# EAGLE board Tape (EAGLE 9.6.2)
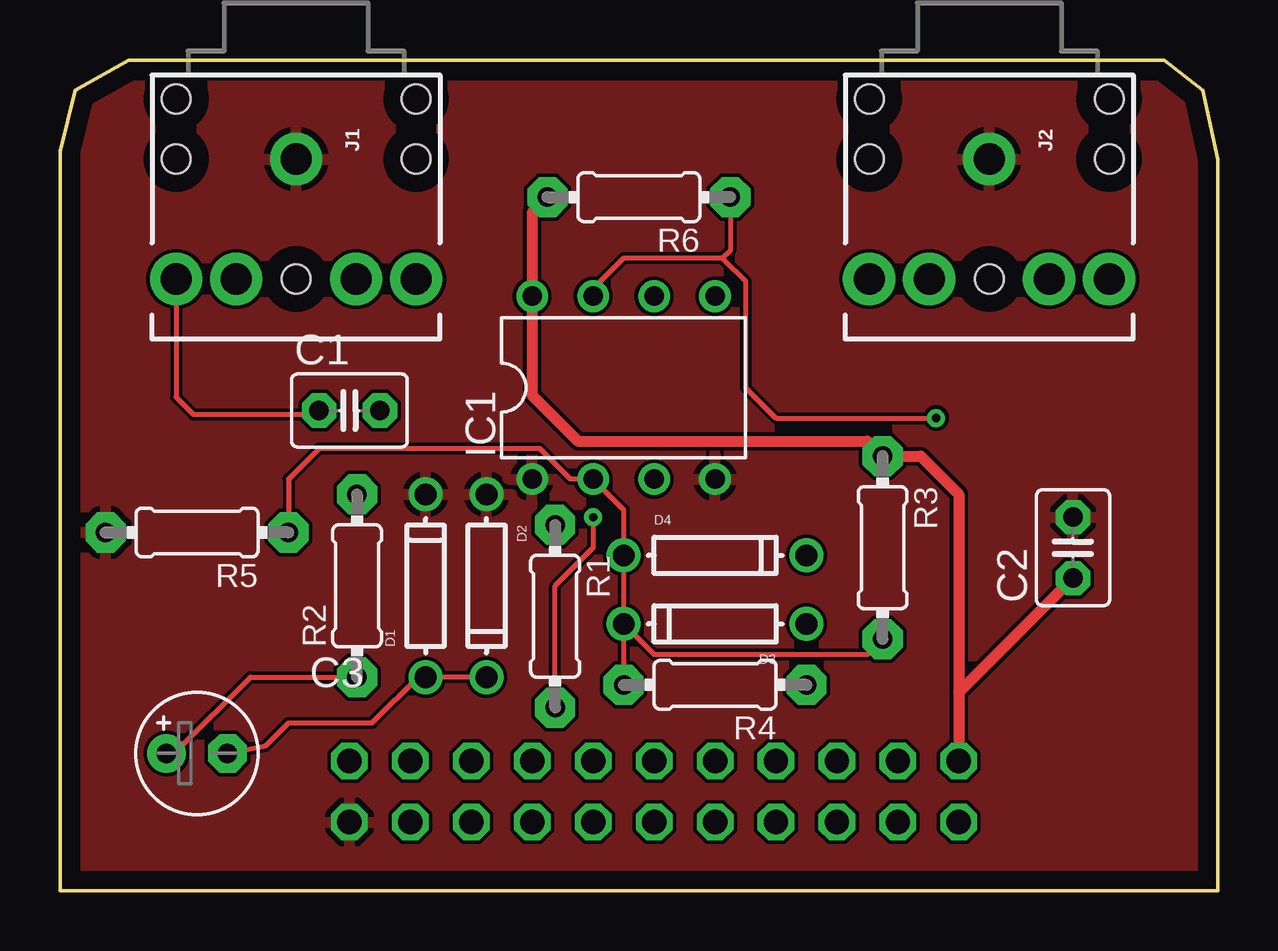
[diagram p0: board, top side]
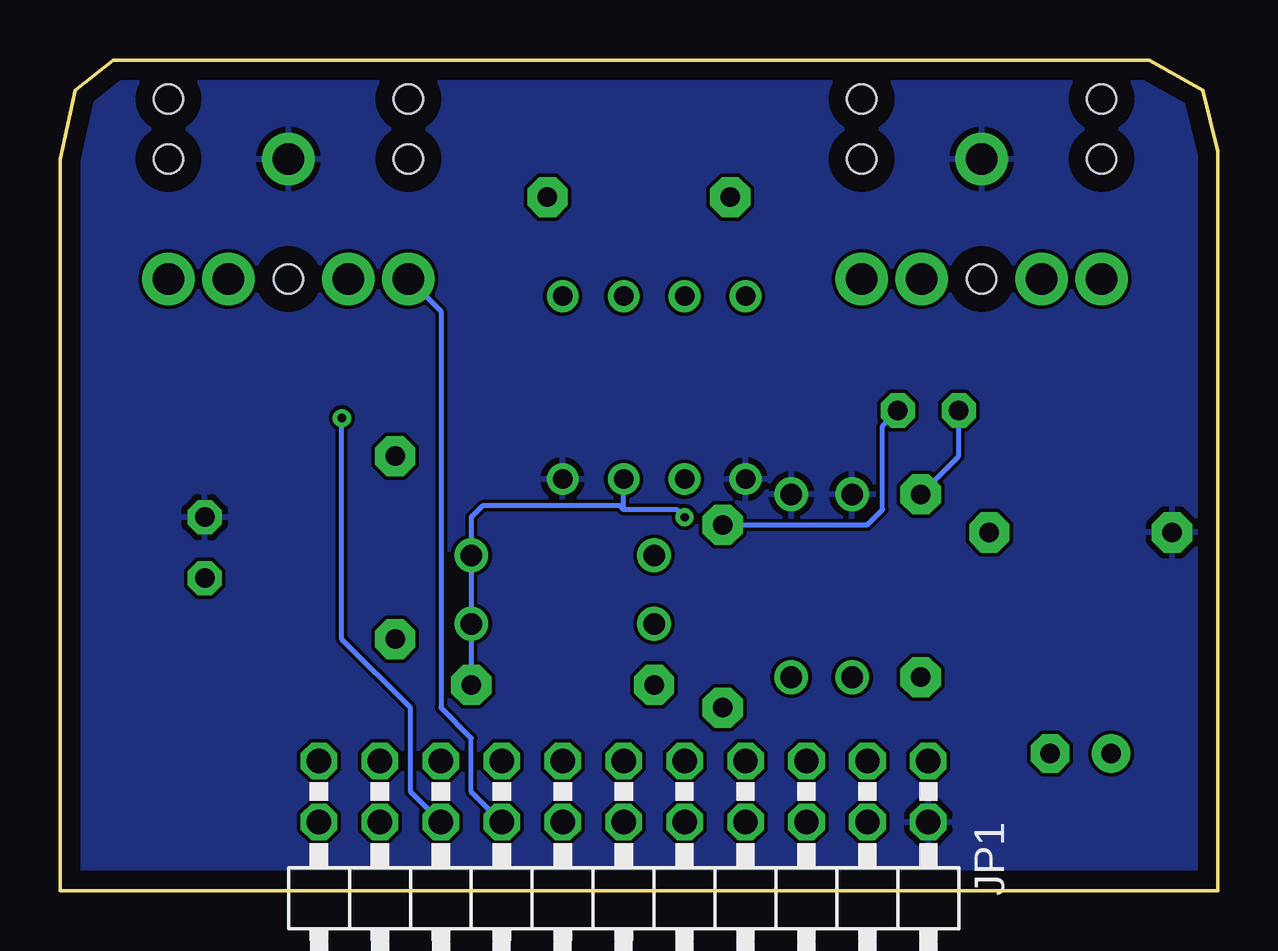
[diagram p1: board, bottom side, seen from below]

Size 48.26 x 34.61 mm. Coordinates in mm from the lower left corner, seen from the top.
Outline: 0.64,33.34 2.86,34.61 46.04,34.61 47.62,33.34 48.26,30.48 48.26,0 0,0 0,30.8 0.64,33.34
Copper layers (1*16): Top 0.035mm / dielectric 1.5mm / Bottom 0.035mm
Design rules "default *": minimum track width 6mil, minimum drill 0.35mm, track to track 6mil, track to pad 6mil, pad to pad 6mil, via to via 6mil, smd to smd 6mil, copper to edge 30mil, drill to drill 6mil, minimum pad ring 10mil, minimum via ring 8mil, stop-mask expansion 4mil, vias tented up to drill 0mil, thermal gap 10mil

## Footprints (pad centres in the part's own frame; a part is rotated, then mirrored left to right if it is on the bottom)
C025-030X050 = drill 0.813 pad 1.422 octagon: 1 -1.27,0; 2 1.27,0
E2,5-5 = drill 0.813 pad 1.6: + -1.27,0 | drill 0.813 pad 1.6 octagon: - 1.27,0
DO-1N4148 = drill 0.9: A -3.81,0; C 3.81,0
DIL08 = drill 0.813 pad 1.27: 1 -3.81,-3.81; 2 -1.27,-3.81; 3 1.27,-3.81; 4 3.81,-3.81; 5 3.81,3.81; 6 1.27,3.81; 7 -1.27,3.81; 8 -3.81,3.81
AUDIO-JACK = drill 1.3 pad 2.184: RING 5,5; RSH 5,2.5; SLEEVE 0,0; TIP 5,-5; TSH 5,-2.5 | hole 1.2: 0,5; -2.5,5; -2.5,-5; 0,-5; 5,0
2X11/90 = drill 1.016 octagon: 1 -12.7,-6.35; 2 -12.7,-3.81; 3 -10.16,-6.35; 4 -10.16,-3.81; 5 -7.62,-6.35; 6 -7.62,-3.81; 7 -5.08,-6.35; 8 -5.08,-3.81; 9 -2.54,-6.35; 10 -2.54,-3.81; 11 0,-6.35; 12 0,-3.81; 13 2.54,-6.35; 14 2.54,-3.81; 15 5.08,-6.35; 16 5.08,-3.81; 17 7.62,-6.35; 18 7.62,-3.81; 19 10.16,-6.35; 20 10.16,-3.81; 21 12.7,-6.35; 22 12.7,-3.81
0204/7 = drill 0.813 pad 1.676 octagon: 1 -3.81,0; 2 3.81,0

## Placement (x,y rotation side)
C1  0.22 uF  [C025-030X050]  12.06,20 0 top
C2  0.1uF  [C025-030X050]  42.23,14.29 90 top
C3  0.47uF  [E2,5-5]  5.71,5.71 0 top
D1  [DO-1N4148]  15.24,12.7 90 top
D2  [DO-1N4148]  17.78,12.7 270 top
D3  [DO-1N4148]  27.3,11.11 180 top
D4  [DO-1N4148]  27.3,13.97 0 top
IC1  LM311N  [DIL08]  23.5,20.96 0 top
J1  AUDIO_JACK_3.5MM_PTH  [AUDIO-JACK]  9.84,30.48 270 top
J2  AUDIO_JACK_3.5MM_PTH  [AUDIO-JACK]  38.73,30.48 270 top
JP1  [2X11/90]  24.77,-0.95 180 bottom
R1  1k  [0204/7]  20.64,11.43 270 top
R2  100  [0204/7]  12.38,12.7 90 top
R3  100  [0204/7]  34.29,14.29 270 top
R4  10k  [0204/7]  27.3,8.57 180 top
R5  100  [0204/7]  5.71,14.92 180 top
R6  1k  [0204/7]  24.13,28.89 180 top

## Library data of the parts
C1-C3 D1-D4 R1-R6 = adafruit
IC1 = linear
J1 J2 = SparkFun-Connectors; PROD_ID: CONN-08774; SF_ID: PRT-08032
JP1 = pinhead

## Nets
18: J2.TIP JP1.16
GND: C2.2 D1.C D2.A IC1.1 IC1.4 J1.SLEEVE J2.SLEEVE JP1.2 R5.2
N$1: IC1.7 JP1.18 R6.1
N$2: C1.2 R1.1
N$3: C3.- D1.A D2.C
N$4: C3.+ R2.1
N$21: D3.A D4.C IC1.3 R1.2 R4.1
N$22: D3.C D4.A IC1.2 R3.2 R4.2 R5.1
N$23: C1.1 J1.TIP R2.2
VCC: C2.1 IC1.8 JP1.21 R3.1 R6.2

## Tracks (layer width: path | path; a pad name or v marks a point on that pad's centre or on a via)
18
  Bottom 0.203: JP1.16 31.12,4.13 31.12,6.35 32.38,7.62 32.38,24.13 J2.TIP
GND
  pour Top: -2.22,34.92 -2.22,-1.27 49.21,-1.27 49.21,34.92
  pour Bottom: -2.54,35.56 -2.54,-1.27 -2.22,-1.59 49.21,-1.59 49.53,-1.91 49.53,35.88 -2.22,35.88
N$1  (via drill 0.35)
  Top 0.203: R6.1 27.94,26.67 27.62,26.35 | 27.62,26.35 23.5,26.35 22.23,25.08 IC1.7 | 27.62,26.35 28.58,25.4 28.58,20.96 29.84,19.68 v36.51,19.68
  Bottom 0.203: JP1.18 33.66,4.13 33.66,7.62 36.51,10.48 v36.51,19.68
N$2
  Bottom 0.203: R1.1 14.61,15.24 13.97,15.87 13.97,19.37 C1.2
N$3
  Top 0.203: D2.C D1.A 14.92,8.89 13.02,6.98 9.53,6.98 8.57,6.03 C3.-
N$4
  Top 0.203: C3.+ 4.76,5.71 7.94,8.89 R2.1
N$21  (via drill 0.35)
  Top 0.203: R1.2 20.64,12.7 22.23,14.29 v22.23,15.56
  Bottom 0.203: v22.23,15.56 22.54,15.87 24.77,15.87 | 24.77,15.87 24.92,16.03 30.64,16.03 31.12,15.56 D3.A | 24.77,15.87 IC1.3 | D3.A R4.1 | D4.C D3.A
N$22
  Top 0.203: D3.C D4.A 23.5,15.87 IC1.2 21.27,17.14 20,18.41 10.79,18.41 9.53,17.14 R5.1 | D3.C R4.2 | R3.2 33.66,9.84 24.77,9.84 D3.C
N$23
  Top 0.203: C1.1 10.64,19.84 5.56,19.84 4.84,20.56 J1.TIP
  Bottom 0.203: C1.1 10.79,18.1 R2.2
VCC
  Top 0.457: C2.1 37.47,8.26 | 37.47,8.26 JP1.21 | 37.47,8.26 37.47,16.51 35.88,18.1 R3.1 33.66,18.73 21.59,18.73 19.68,20.64 IC1.8 19.68,28.26 R6.2